# EAGLE board 7segement4digits1badidea-shield-mk-2 (EAGLE 6.5.0)
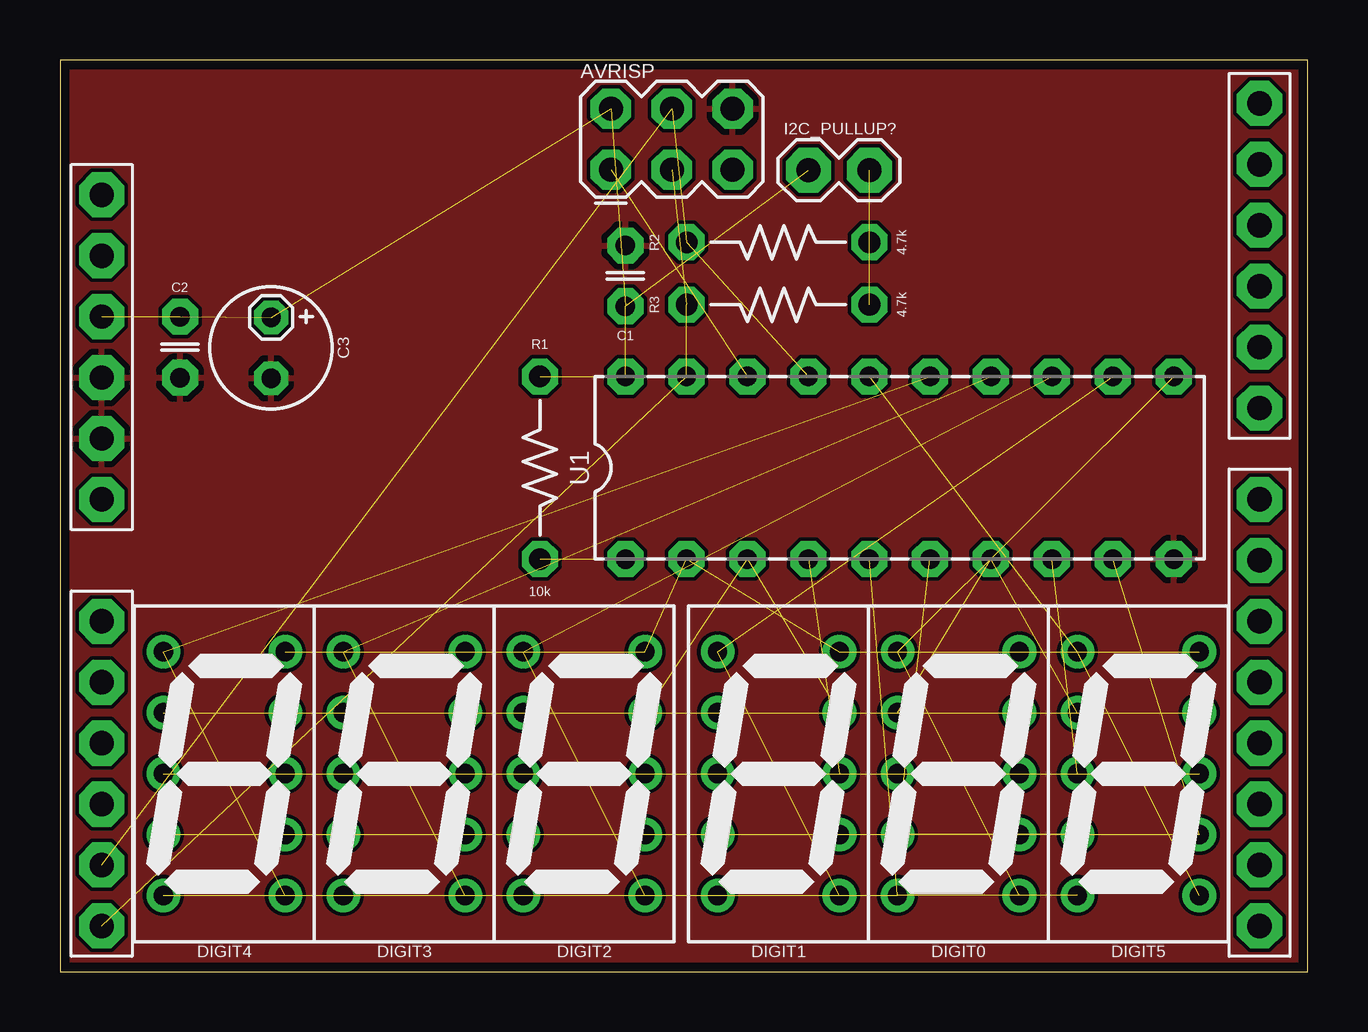
[diagram p0: board, top side]

Size 52 x 38 mm. Coordinates in mm from the lower left corner, seen from the top.
Outline: 52,38 0,38 0,0 52,0 52,38
Copper layers (1*16): Top 0.0356mm / dielectric 1.5011mm / Bottom 0.0356mm
Design rules "LaenPCBOrder_2": minimum track width 6mil, minimum drill 13mil, track to track 6mil, track to pad 6mil, pad to pad 6mil, via to via 6mil, smd to smd 6mil, copper to edge 15mil, drill to drill 6mil, minimum pad ring 7mil, minimum via ring 7mil, stop-mask expansion 3mil, vias tented up to drill 20mil, thermal gap 10mil

## Footprints (pad centres in the part's own frame; a part is rotated, then mirrored left to right if it is on the bottom)
2X3 = drill 1 pad 1.676 octagon: 1 -2.54,-1.27; 2 -2.54,1.27; 3 0,-1.27; 4 0,1.27; 5 2.54,-1.27; 6 2.54,1.27
C025-024X044 = drill 0.813 pad 1.5 octagon: 1 -1.27,0; 2 1.27,0
E2,5-5 = drill 0.8 pad 1.4 octagon: + -1.27,0; - 1.27,0
7SEG_1DIG_10MM = drill 0.8 pad 1.4: 1 -2.54,5.08; 2 -2.54,2.54; 3 -2.54,0; 4 -2.54,-2.54; 5 -2.54,-5.08; 6 2.54,-5.08; 7 2.54,-2.54; 8 2.54,0; 9 2.54,2.54; 10 2.54,5.08
1X02 = drill 1 pad 1.88 octagon: 1 0,0; 2 2.54,0
RESISTOR-AXIAL-PTH-7.68MM = drill 0.9 pad 1.5 octagon: P$1 -3.81,0; P$2 3.81,0
DIL20 = drill 0.8 pad 1.5 octagon: 1 -11.43,-3.81; 2 -8.89,-3.81; 3 -6.35,-3.81; 4 -3.81,-3.81; 5 -1.27,-3.81; 6 1.27,-3.81; 7 3.81,-3.81; 8 6.35,-3.81; 9 8.89,-3.81; 10 11.43,-3.81; 11 11.43,3.81; 12 8.89,3.81; 13 6.35,3.81; 14 3.81,3.81; 15 1.27,3.81; 16 -1.27,3.81; 17 -3.81,3.81; 18 -6.35,3.81; 19 -8.89,3.81; 20 -11.43,3.81
ARDUINO_SHIELD_NOOUTLINE_INSIDE_SMALLER = drill 1.016 pad 1.88 octagon: 3.3V 48.26,-27.94; 5V 48.26,-25.4; A0 48.26,-12.7; A1 48.26,-10.16; A2 48.26,-7.62; A3 48.26,-5.08; A4 48.26,-2.54; A5 48.26,0; D2 0,-5.08; D3 0,-7.62; D4 0,-10.16; D5 0,-12.7; D6 0,-15.24; D7 0,-17.78; D8 0,-21.59; D9 0,-24.13; D10 0,-26.67; D11 0,-29.21; D12 0,-31.75; D13 0,-34.29; GND@0 48.26,-22.86; GND@1 48.26,-20.32; RES 48.26,-30.48; RX 0,0; TX 0,-2.54; VIN 48.26,-17.78

## Placement (x,y rotation side)
AVRISP  AVR_SPI_PRG_6PTH  [2X3]  25.5,34.7 0 top
C1  0.1uF  [C025-024X044]  23.57,29 90 top
C2  1uF  [C025-024X044]  5,26.03 270 top
C3  10uF  [E2,5-5]  8.8,26 270 top
DIGIT0  7SEG_1DIGPTH-10MM  [7SEG_1DIG_10MM]  37.45,8.25 0 top
DIGIT1  7SEG_1DIGPTH-10MM  [7SEG_1DIG_10MM]  29.95,8.25 0 top
DIGIT2  7SEG_1DIGPTH-10MM  [7SEG_1DIG_10MM]  21.85,8.25 0 top
DIGIT3  7SEG_1DIGPTH-10MM  [7SEG_1DIG_10MM]  14.35,8.25 0 top
DIGIT4  7SEG_1DIGPTH-10MM  [7SEG_1DIG_10MM]  6.85,8.25 0 top
DIGIT5  7SEG_1DIGPTH-10MM  [7SEG_1DIG_10MM]  44.95,8.25 0 top
I2C_PULLUP?  M02PTH  [1X02]  31.2,33.4 0 top
R1  10k  [RESISTOR-AXIAL-PTH-7.68MM]  20,21 270 top
R2  4.7k  [RESISTOR-AXIAL-PTH-7.68MM]  29.93,30.4 0 top
R3  4.7k  [RESISTOR-AXIAL-PTH-7.68MM]  29.93,27.8 0 top
U1  ATTINY4213  [DIL20]  35,21 0 top
U2  [ARDUINO_SHIELD_NOOUTLINE_INSIDE_SMALLER]  50,1.9 180 top

## Library data of the parts
AVRISP C1-C3 DIGIT0 DIGIT1-DIGIT5 I2C_PULLUP? R1-R3 U1 U2 = A_butts

## Nets
A: DIGIT0.10 DIGIT1.10 DIGIT2.10 DIGIT3.10 DIGIT4.10 DIGIT5.10 U1.2
B: DIGIT0.9 DIGIT1.9 DIGIT2.9 DIGIT3.9 DIGIT4.9 DIGIT5.9 U1.3
C: DIGIT0.8 DIGIT1.8 DIGIT2.8 DIGIT3.8 DIGIT4.8 DIGIT5.8 U1.4
D: DIGIT0.5 DIGIT1.5 DIGIT2.5 DIGIT3.5 DIGIT4.5 DIGIT5.5 U1.5
DIG0: DIGIT0.1 DIGIT0.6 U1.11
DIG1: DIGIT1.1 DIGIT1.6 U1.12
DIG2: DIGIT2.1 DIGIT2.6 U1.13
DIG3: DIGIT3.1 DIGIT3.6 U1.14
DIG4: DIGIT4.1 DIGIT4.6 U1.15
DIG5: DIGIT5.1 DIGIT5.6 U1.16
DP: DIGIT0.7 DIGIT1.7 DIGIT2.7 DIGIT3.7 DIGIT4.7 DIGIT5.7 U1.9
E: DIGIT0.4 DIGIT1.4 DIGIT2.4 DIGIT3.4 DIGIT4.4 DIGIT5.4 U1.6
F: DIGIT0.2 DIGIT1.2 DIGIT2.2 DIGIT3.2 DIGIT4.2 DIGIT5.2 U1.7
G: DIGIT0.3 DIGIT1.3 DIGIT2.3 DIGIT3.3 DIGIT4.3 DIGIT5.3 U1.8
GND: AVRISP.6 C1.2 C2.2 C3.- U1.10 U2.GND@0 U2.GND@1
MISO: AVRISP.1 U1.18
MOSI/SDA: AVRISP.4 R2.P$1 U1.17 U2.A4
N$1: R1.P$2 U1.1
N$4: I2C_PULLUP?.2 R2.P$2 R3.P$2
RESET: AVRISP.5
SCK/SCL: AVRISP.3 R3.P$1 U1.19 U2.A5
VCC: AVRISP.2 C1.1 C2.1 C3.+ I2C_PULLUP?.1 R1.P$1 U1.20 U2.5V

## Tracks (layer width: path | path; a pad name or v marks a point on that pad's centre or on a via)
A  (6 unrouted)
B  (6 unrouted)
C  (6 unrouted)
D  (6 unrouted)
DIG0  (2 unrouted)
DIG1  (2 unrouted)
DIG2  (2 unrouted)
DIG3  (2 unrouted)
DIG4  (2 unrouted)
DIG5  (2 unrouted)
DP  (6 unrouted)
E  (6 unrouted)
F  (6 unrouted)
G  (6 unrouted)
GND
  pour Top: 52,38 52,0 0,0 0,38
MISO  (1 unrouted)
MOSI/SDA  (3 unrouted)
N$1  (1 unrouted)
N$4  (2 unrouted)
SCK/SCL  (3 unrouted)
VCC  (7 unrouted)